# EAGLE board MBO (EAGLE 7.4.0)
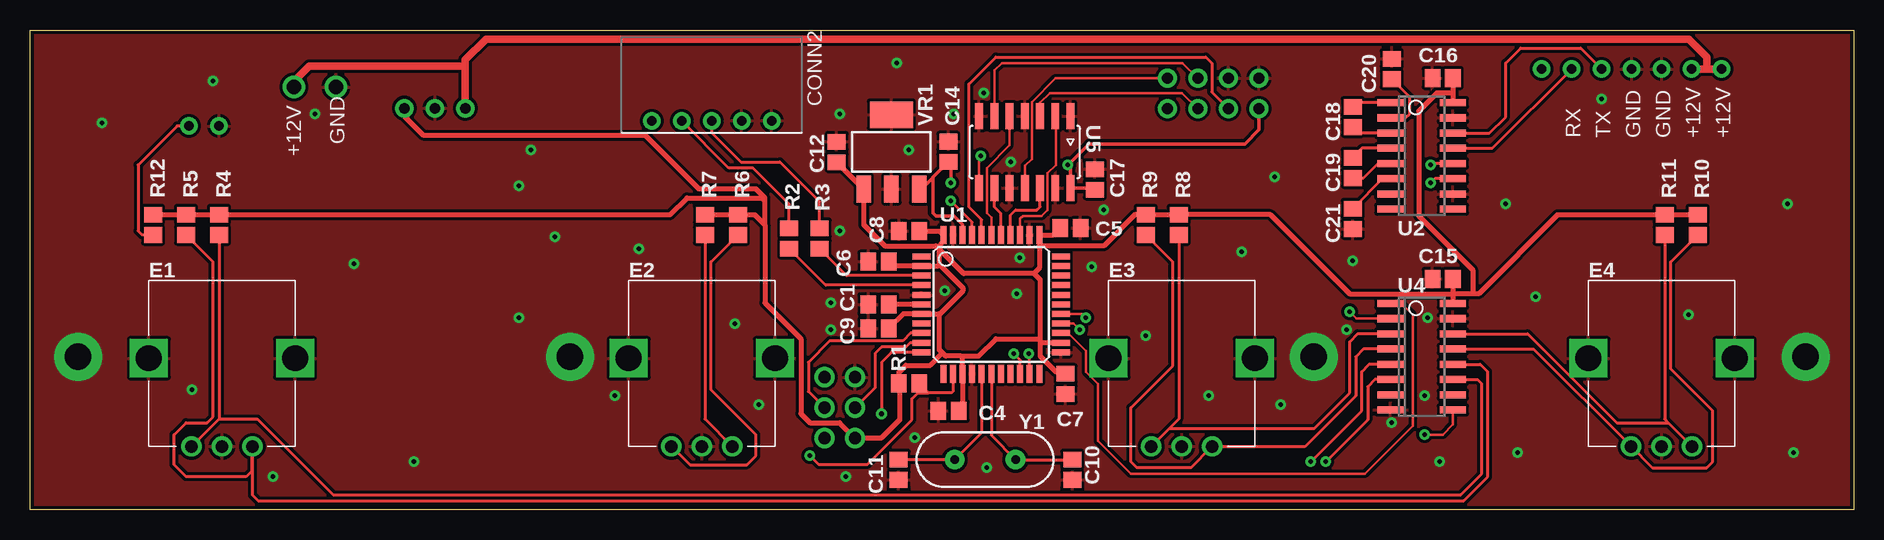
[diagram p0: board, top side]
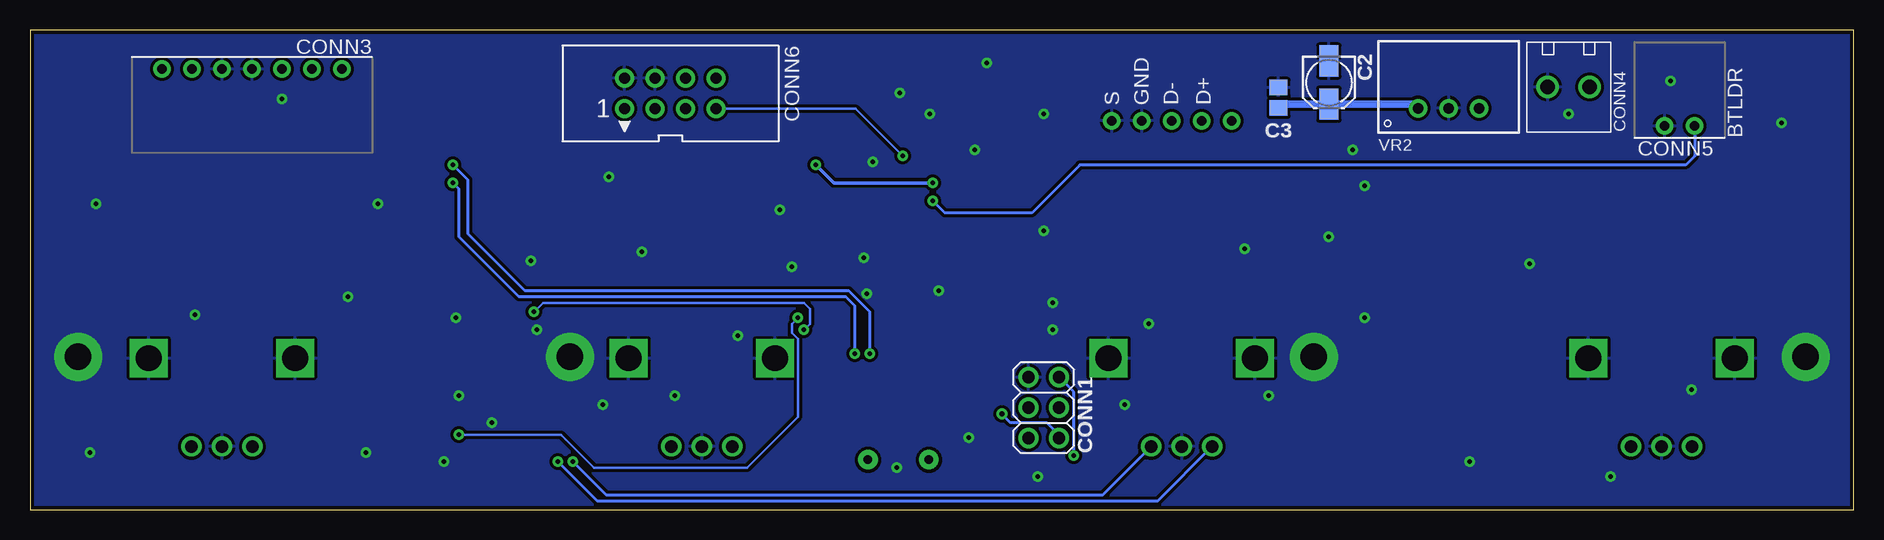
[diagram p1: board, bottom side, seen from below]

Size 152 x 40 mm. Coordinates in mm from the lower left corner, seen from the top.
Outline: 0,40 152,40 152,0 0,0 0,40
Copper layers (1*16): Top 0.035mm / dielectric 1.5mm / Bottom 0.035mm
Design rules "smiery *": minimum track width 8mil, minimum drill 12mil, track to track 7mil, track to pad 5mil, pad to pad 5mil, via to via 6mil, smd to smd 0mil, copper to edge 12mil, drill to drill 10mil, minimum pad ring 13mil, minimum via ring 10mil, stop-mask expansion 2mil, vias tented up to drill 25mil, thermal gap 10mil
Net classes: 0 default: width 0.203 mm; 1 vcc: width 0.254 mm

## Footprints (pad centres in the part's own frame; a part is rotated, then mirrored left to right if it is on the bottom)
C0805 = smd 1.3 x 1.5: 1 -0.85,0; 2 0.85,0
153CLV-0405 = smd 2.6 x 1.6: + 1.8,0; - -1.8,0
2X03-2.54-V = drill 1.016: 1 -2.54,-1.27; 2 -2.54,1.27; 3 0,-1.27; 4 0,1.27; 5 2.54,-1.27; 6 2.54,1.27
JST-XH-05P-H = drill 0.8: 1 -5,0; 2 -2.5,0; 3 0,0; 4 2.5,0; 5 5,0
JST-XH-07P-H = drill 0.8: 1 -7.5,0; 2 -5,0; 3 -2.5,0; 4 0,0; 5 2.5,0; 6 5,0; 7 7.5,0
MOLEX-39357-0002 = drill 1.2: P$1 -1.75,0; P$2 1.75,0
JST-XH-02P-H = drill 0.8: 1 -1.25,0; 2 1.25,0
IDC-08P-2.54 = drill 0.914: 1 -3.81,-1.27; 2 -3.81,1.27; 3 -1.27,-1.27; 4 -1.27,1.27; 5 1.27,-1.27; 6 1.27,1.27; 7 3.81,-1.27; 8 3.81,1.27
EC12E-1 = drill 1.016: A -2.54,-7.493; B 2.54,-7.493; C 0,-7.493 | drill 2.159 square: S1 -6.096,-0.127; S2 6.096,-0.127
R0805 = smd 1.3 x 1.5: 1 -0.85,0; 2 0.85,0
TQFP-44 = smd 1.5 x 0.5: 1 -5.8,4; 2 -5.8,3.2; 3 -5.8,2.4; 4 -5.8,1.6; 5 -5.8,0.8; 6 -5.8,0; 7 -5.8,-0.8; 8 -5.8,-1.6; 9 -5.8,-2.4; 10 -5.8,-3.2; 11 -5.8,-4; 23 5.8,-4; 24 5.8,-3.2; 25 5.8,-2.4; 26 5.8,-1.6; 27 5.8,-0.8; 28 5.8,0; 29 5.8,0.8; 30 5.8,1.6; 31 5.8,2.4; 32 5.8,3.2; 33 5.8,4 | smd 0.5 x 1.5: 12 -4,-5.8; 13 -3.2,-5.8; 14 -2.4,-5.8; 15 -1.6,-5.8; 16 -0.8,-5.8; 17 0,-5.8; 18 0.8,-5.8; 19 1.6,-5.8; 20 2.4,-5.8; 21 3.2,-5.8; 22 4,-5.8; 34 4,5.8; 35 3.2,5.8; 36 2.4,5.8; 37 1.6,5.8; 38 0.8,5.8; 39 0,5.8; 40 -0.8,5.8; 41 -1.6,5.8; 42 -2.4,5.8; 43 -3.2,5.8; 44 -4,5.8
SO16 = smd 2.2 x 0.6: 1 -2.6,4.445; 2 -2.6,3.175; 3 -2.6,1.905; 4 -2.6,0.635; 5 -2.6,-0.635; 6 -2.6,-1.905; 7 -2.6,-3.175; 8 -2.6,-4.445; 9 2.6,-4.445; 10 2.6,-3.175; 11 2.6,-1.905; 12 2.6,-0.635; 13 2.6,0.635; 14 2.6,1.905; 15 2.6,3.175; 16 2.6,4.445
SOIC14 = smd 2.2 x 0.66: 1 -3,3.81; 2 -3,2.54; 3 -3,1.27; 4 -3,0; 5 -3,-1.27; 6 -3,-2.54; 7 -3,-3.81; 8 3,-3.81; 9 3,-2.54; 10 3,-1.27; 11 3,0; 12 3,1.27; 13 3,2.54; 14 3,3.81
SOT223 = smd 2.235 x 1.219: 1 -3.099,2.311; 2 -3.099,0; 3 -3.099,-2.311 | smd 2.2 x 3.6: 4 3.099,0
TSR-1-2450 = drill 0.889: 1 -2.54,-1.778; 2 0,-1.778; 3 2.54,-1.778
HC49US = drill 0.7 pad 1.651: 1 -2.54,0; 2 2.54,0

## Placement (x,y rotation side)
C1  1u  [C0805]  70.73,17.12 180 top
C2  10n  [153CLV-0405]  43.73,35.61 270 bottom
C3  100n  [C0805]  47.92,34.34 90 bottom
C4  100n  [C0805]  76.57,8.23 180 top
C5  100n  [C0805]  86.73,23.47 0 top
C6  100n  [C0805]  70.73,20.67 180 top
C7  100n  [C0805]  86.32,10.48 270 top
C8  100n  [C0805]  73.27,23.21 180 top
C9  100n  [C0805]  70.73,15.08 180 top
C10  22p  [C0805]  86.88,3.33 90 top
C11  22p  [C0805]  72.4,3.33 90 top
C12  4.7u  [C0805]  67.23,29.82 90 top
C14  4.7u  [C0805]  76.55,29.84 90 top
C15  100n  [C0805]  117.75,19.25 0 top
C16  100n  [C0805]  117.75,36 0 top
C17  100n  [C0805]  88.76,27.53 90 top
C18  100n  [C0805]  110.25,32.75 270 top
C19  100n  [C0805]  110.25,28.5 270 top
C20  100n  [C0805]  113.5,36.75 90 top
C21  100n  [C0805]  110.25,24.25 270 top
CONN1  PINHD-2X03-TH-2.54MM-V  [2X03-2.54-V]  67.5,8.5 90 bottom
CONN2  PINHD-1X05-JST-XH-H  [JST-XH-05P-H]  56.82,32.42 0 top
CONN3  PINHD-1X07-JST-H  [JST-XH-07P-H]  133.5,36.75 180 bottom
CONN4  PINHD-1X02-MOLEX-39357-0002  [MOLEX-39357-0002]  23.75,35.25 180 bottom
CONN5  PINHD-1X02-JST-XH-H  [JST-XH-02P-H]  14.5,32 0 bottom
CONN6  PINHD-2X04-IDC-2.54-V  [IDC-08P-2.54]  98.62,34.71 0 bottom
E1  ALPS-EC12E24404AX  [EC12E-1]  16,12.75 0 top
E2  ALPS-EC12E24404AX  [EC12E-1]  56,12.75 0 top
E3  ALPS-EC12E24404AX  [EC12E-1]  96,12.75 0 top
E4  ALPS-EC12E24404AX  [EC12E-1]  136,12.75 0 top
R1  10k  [R0805]  73.27,10.51 180 top
R2  22  [R0805]  63.28,22.61 90 top
R3  22  [R0805]  65.82,22.61 90 top
R4  10k  [R0805]  15.75,23.75 90 top
R5  10k  [R0805]  13,23.75 90 top
R6  10k  [R0805]  59,23.75 90 top
R7  10k  [R0805]  56.25,23.75 90 top
R8  10k  [R0805]  95.75,23.75 90 top
R9  10k  [R0805]  93,23.75 90 top
R10  10k  [R0805]  139,23.75 90 top
R11  10k  [R0805]  136.25,23.75 90 top
R12  10k  [R0805]  10.25,23.75 90 top
U1  ATMEGA-32U4TQFP  [TQFP-44]  80.13,17.12 0 top
U2  MAX3232  [SO16]  116,29.5 0 top
U4  74HC165  [SO16]  116,12.75 0 top
U5  74AHC125  [SOIC14]  82.92,29.82 270 top
VR1  MCP1825  [SOT223]  71.8,29.83 90 top
VR2  TSR-1-2450  [TSR-1-2450]  33.75,35.25 0 bottom
Y1  16MHz  [HC49US]  79.62,4.16 180 top

## Library data of the parts
C1 C3-C12 C14-C21 CONN1-CONN3 CONN5 CONN6 E1-E4 R1-R12 = igor_lbr
C2 = igor_lbr; MANUFACTURER: Multicomp; MPN: MCVVT016M100CA1L
CONN4 = igor_lbr; MANUFACTURER: Molex; MPN: 39357-0002
U1 = igor_lbr; MPN: ATMEGA32U4-AUR
U2 = igor_lbr; MANUFACTURER: Texas Instruments; MPN: MAX3232CDR
U4 = igor_lbr; MANUFACTURER: Nexperia; MPN: 74HC165D
U5 = igor_lbr; MANUFACTURER: Texas Instruments; MPN: SN74AHC125DR
VR1 = igor_lbr; MANUFACTURER: Microchip; MPN: MCP1825S-3302E/DB
VR2 = igor_lbr; MANUFACTURER: Traco Power; MPN: TSR 1-2450
Y1 = igor_lbr; MANUFACTURER: TXC; MPN: 9B-8.000MEEJ-B

## Nets
+3V3: C14.1 C17.1 CONN6.1 U1.42 U5.14 VR1.3
+5V: C4.1 C5.1 C6.1 C7.1 C8.1 C9.1 C12.1 C15.2 C16.2 CONN1.2 R1.2 R4.2 R5.2 R6.2 R7.2 R8.2 R9.2 R10.2 R11.2 R12.2 U1.2 U1.7 U1.14 U1.24 U1.34 U1.44 U2.16 U4.16 VR1.1 VR2.3
+12V: C2.+ C3.1 CONN3.6 CONN3.7 CONN4.P$1 VR2.1
BTLDR_BUTTON: CONN5.2 R12.1 U1.41
C1+: C18.1 U2.1
C1-: C18.2 U2.3
C2+: C19.1 U2.4
C2-: C19.2 U2.5
D+: R2.1 U1.4
D+R: CONN2.2 R2.2
D-: R3.1 U1.3
D-R: CONN2.3 R3.2
DISPLAY_RX_5V: U1.20 U2.12
DISPLAY_RX_RS: CONN3.2 U2.13
DISPLAY_TX_5V: U1.21 U2.11
DISPLAY_TX_RS: CONN3.3 U2.14
E1A: E1.A R4.1 U4.11
E1B: E1.B R5.1 U4.12
E2A: E2.A R6.1 U4.6
E2B: E2.B R7.1 U4.5
E3A: E3.A R8.1 U4.3
E3B: E3.B R9.1 U4.4
E4A: E4.A R10.1 U4.13
E4B: E4.B R11.1 U4.14
GND: C1.2 C2.- C3.2 C4.2 C5.2 C6.2 C7.2 C8.2 C9.2 C10.1 C11.1 C12.2 C14.2 C15.1 C16.1 C17.2 C20.2 C21.2 CONN1.6 CONN2.4 CONN2.5 CONN3.4 CONN3.5 CONN4.P$2 CONN5.1 CONN6.2 CONN6.4 E1.C E1.S1 E1.S2 E2.C E2.S1 E2.S2 E3.C E3.S1 E3.S2 E4.C E4.S1 E4.S2 U1.5 U1.15 U1.23 U1.35 U1.43 U2.10 U2.15 U4.8 U4.15 U5.1 U5.4 U5.7 U5.10 U5.13 VR1.2 VR1.4 VR2.2
MISO: CONN1.1 U1.11
MOSI: CONN1.4 U1.10
MUX_COMMON_1: CONN6.3 U1.40
MUX_S0_3V3: CONN6.8 U5.11
MUX_S0_5V: U1.37 U5.12
MUX_S1_3V3: CONN6.7 U5.8
MUX_S1_5V: U1.38 U5.9
MUX_S2_3V3: CONN6.5 U5.3
MUX_S2_5V: U1.36 U5.2
MUX_S3_3V3: CONN6.6 U5.6
MUX_S3_5V: U1.39 U5.5
N$1: C1.1 U1.6
N$5: U1.30
RESET: CONN1.5 R1.1 U1.13
SCK: CONN1.3 U1.9
SR_DIN_CLOCK: U1.26 U4.2
SR_DIN_DATA: U1.27 U4.9
SR_DIN_LATCH: U1.25 U4.1
V+: C20.1 U2.2
V-: C21.1 U2.6
XTAL1: C10.2 U1.17 Y1.1
XTAL2: C11.2 U1.16 Y1.2

## Tracks (layer width: path | path; a pad name or v marks a point on that pad's centre or on a via)
+3V3  (via drill 0.4 pad 0.6)
  Top 0.305: C17.1 88.63,26.82 U5.14 86.73,28.52 v86.5,28.75 88.25,30.5 101.25,30.5 102.43,31.68 CONN6.1 | VR1.3 74.29,26.73 75.25,27.68 | C14.1 75.28,27.72 75.25,27.68 | 76.79,28.75 C14.1 | v76.75,27.25 76.75,28.79 C14.1 | U1.42 77.73,23.77 77,24.5 75.5,24.5 75.25,24.75 75.25,27.68
  Bottom 0.305: v76.75,27.25 85,27.25 v86.5,28.75
+5V
  Top 0.406: C4.1 77.73,8.53 U1.14 77.73,12.66 77.59,12.8 | C5.1 85.33,22.92 U1.34 84.13,22 | C6.1 71.93,20.32 U1.2 75.71,20.32 75.81,20.42 | C9.1 72.81,16.32 U1.7 75.77,16.32 75.81,16.35 75.81,13.31 76.06,13.05 | 83.68,19.68 84.19,19.18 84.19,14.25 | 84.19,14.25 84.19,13.81 | 77.59,12.8 76.32,12.8 76.06,13.05 | U1.24 84.29,13.92 84.19,13.81 | 76.06,13.05 75.05,12.04 73.01,12.04 72.42,11.44 R1.2 72.51,10.42 72.51,7.51 70.96,5.96 CONN1.2 67.48,7.25 65,7.25 64.25,8 64.25,14.25 61.25,17.25 61.25,23.75 | C12.1 67.25,28.97 VR1.1 69.49,23.76 71.25,22 75.5,22 75.62,21.88 | C8.1 75.83,23.21 U1.44 76.13,22.38 75.62,21.88 | 84.13,22 84.13,20.13 83.68,19.68 | 75.81,20.42 75.81,21.69 | 75.81,21.69 75.62,21.88 | 83.68,19.68 77.82,19.68 75.81,21.69 | 75.81,20.42 75.83,20.42 77.75,18.5 77.75,18.25 75.75,16.25 | 85.92,11.33 C7.1 86.14,11.5 85.5,11.5 84.19,12.81 84.19,13.81 | C15.2 118.6,18 | 118.6,18 U4.16 | R7.2 R6.2 60.4,24.6 61.25,23.75 | R10.2 R11.2 127.35,24.6 120.75,18 120.25,18 | C16.2 118.6,34.75 | 118.6,34.75 U2.16 | 84.13,22 89.5,22 92.1,24.6 R9.2 R8.2 103.4,24.6 110,18 118.6,18 | 61.25,23.75 61.25,25.75 | 61.25,25.75 61.25,26 60.5,26.75 55.75,26.75 51.25,31.25 32.75,31.25 31.21,32.79 VR2.3 | 120.25,18 118.6,18 | 118.6,34.75 117.25,34.75 115.75,33.25 115.75,24.5 120.25,20 120.25,18 | 77.59,12.8 79.05,12.8 80.5,14.25 84.19,14.25 | 61.25,25.75 61,26 54.75,26 53.35,24.6 R4.2 R5.2 R12.2
+12V
  Top 0.61: CONN3.6 139.75,36.75 | 139.75,36.75 CONN3.7 | VR2.1 36.29,37 | 36.29,37 36.29,37.54 38,39.25 138.25,39.25 139.75,37.75 139.75,36.75 | CONN4.P$1 22,35.75 23.25,37 36.29,37
  Bottom 0.61: C3.1 47.61,33.81 C2.+ 36.63,33.81 VR2.1
BTLDR_BUTTON  (via drill 0.4)
  Top 0.254: CONN5.2 12.25,32 9,28.75 9,23.25 9.35,22.9 R12.1 | U1.41 78.53,23.97 v76.75,25.75
  Bottom 0.254: CONN5.2 13.25,29.5 14,28.75 64.5,28.75 68.5,24.75 75.75,24.75 v76.75,25.75
C1+
  Top 0.254: U2.1 110.59,33.95 C18.1
C1-
  Top 0.254: U2.3 110.75,31.41 C18.2
C2+
  Top 0.254: U2.4 111.03,30.14 C19.1
C2-
  Top 0.254: C19.2 111.15,27.65 112.36,28.86 U2.5
D+
  Top 0.254: U1.4 66.33,18.72 R2.1
D+R
  Top 0.254: R2.2 63.28,25.47 60.25,28.5 58.25,28.5 CONN2.2
D-
  Top 0.254: U1.3 68.07,19.52 R3.1
D-R
  Top 0.254: 65.79,23.46 R3.2 65.82,25.68 62.5,29 59.25,29 56.82,31.43 CONN2.3
DISPLAY_RX_5V  (via drill 0.4)
  Top 0.254: U1.20 82.53,12.47 v82,13 | U2.12 116.86,28.86 v116.75,28.75
  Bottom 0.254: v82,13 82,16.5 83.75,18.25 110.75,18.25 115.5,23 115.5,27.5 v116.75,28.75
DISPLAY_RX_RS
  Top 0.254: U2.13 121.89,30.14 CONN3.2
DISPLAY_TX_5V  (via drill 0.4)
  Top 0.254: U1.21 83.33,12.92 v83.25,13 | U2.11 117.09,27.59 v116.75,27.25
  Bottom 0.254: v83.25,13 83.25,17 84,17.75 111.25,17.75 116.25,22.75 116.25,26.75 v116.75,27.25
DISPLAY_TX_RS
  Top 0.254: U2.14 121.66,31.41 123,32.75 123,37.25 124.25,38.5 129.25,38.5 CONN3.3
E1A
  Top 0.254: R4.1 15.75,7.55 | 15.75,7.55 E1.A | 15.75,7.55 18.95,7.55 25.25,1.25 119.25,1.25 121,3 121,10.5 120.66,10.85 U4.11
E1B
  Top 0.254: R5.1 15.25,20.65 15.25,7.75 14.75,7.25 13,7.25 12,6.25 12,3.75 13,2.75 18,2.75 18.5,3.25 18.5,5.22 E1.B 18.54,1.21 19,0.75 119.5,0.75 121.5,2.75 121.5,11.5 120.89,12.12 U4.12
E2A  (via drill 0.4)
  Top 0.254: R6.1 56.75,20.65 56.75,10 60.5,6.25 60.5,4.5 59.75,3.75 55,3.75 53.49,5.26 E2.A | v108,4 111.5,7.5 111.5,10.25 112.09,10.85 U4.6
  Bottom 0.254: v108,4 104.75,0.75 57.97,0.75 E2.A
E2B  (via drill 0.4)
  Top 0.254: v106.75,4 111,8.25 111,11.5 111.61,12.12 U4.5 | R7.1 56.25,7.55 E2.B
  Bottom 0.254: v106.75,4 104,1.25 62.55,1.25 E2.B
E3A
  Top 0.254: U4.3 110.66,14.65 110,14 110,9.75 107,6.75 94.95,6.75 | 94.95,6.75 E3.A | R8.1 95.75,7.55 94.95,6.75
E3B
  Top 0.254: R9.1 95.25,20.65 95.25,12 91.75,8.5 91.75,4 92.25,3.5 96.78,3.5 E3.B 106.25,5.25 110.5,9.5 110.5,12.75 111.14,13.38 U4.4
E4A
  Top 0.254: R10.1 136.75,20.65 136.75,11.75 140.25,8.25 140.25,4 139.75,3.5 135.22,3.5 E4.A 125.33,13.38 U4.13
E4B
  Top 0.254: U4.14 124.84,14.65 132.25,7.25 136.55,7.25 | 136.55,7.25 E4.B | R11.1 136.25,7.55 136.55,7.25
GND  (via drill 0.4 pad 0.6, 2.2 pad 4)
  other vias: 73.25,30 82.5,21 82.25,18 77,33 79.5,34.75 89.5,25 67.5,23.25 66.75,17.25 66.75,15 76.25,18.25 79.75,3.5 73.75,6 68,2.75 67.5,33 116.5,16 109.75,15 81.75,29 40.75,16 50.75,21.75 43.75,22.75 32,4 27,20.5 23.75,33 40.75,27 131,34.25 124,4.75 117.5,4 138.25,16.25 123,25.5 72.25,37.25 13.5,10 6,32.25 15.25,35.75 48.75,9.5 4,12.75 148,12.75 45,12.75 107,12.75 104.25,8.75 116.25,9.5 113.5,7.25 58.75,15.5 60.75,8.75 103.75,27.75 101,21.5 110.25,20.75 125.5,17.75 147,4.75 146.5,25.5 93,14.5 88.5,20.25 98.25,9.5 20.25,2.75 41.75,30
  pour Bottom (isolate 0.254): 0,40 152,40 152,0 0,0
  pour Top (isolate 0.254): 0,40 152,40 152,0 0,0
MISO  (via drill 0.4 pad 0.6)
  Top 0.254: U1.11 71.81,13.12 70.98,12.29 v70.98,7.97
  Bottom 0.254: CONN1.1 66.23,6.23 67.25,7.25 70.26,7.25 v70.98,7.97
MOSI
  Top 0.254: U1.10 73.37,13.92 73.01,13.56 70.98,13.56 70.47,13.05 70.47,10.2 CONN1.4
MUX_COMMON_1
  Top 0.254: U1.40 79.33,24.17 78.25,25.25 78.25,35.5 80.5,37.75 98,37.75 98.5,37.25 98.5,34.83 CONN6.3
MUX_S0_3V3
  Top 0.203: CONN6.8 85.48,35.98 83.5,34 83.5,29.25 82.92,28.67 U5.11
MUX_S0_5V
  Top 0.254: U1.37 81.73,24.56 82.16,24.99 83.94,24.99 84.19,25.24 U5.12
MUX_S1_3V3  (via drill 0.4 pad 0.6)
  Top 0.203: U5.8 79.11,29.36 v79.25,29.5
  Bottom 0.203: CONN6.7 83.19,33.44 v79.25,29.5
MUX_S1_5V
  Top 0.254: U1.38 80.93,24.7 80.38,25.24 U5.9
MUX_S2_3V3
  Top 0.203: U5.3 84.19,33.94 85,34.75 96.04,34.75 CONN6.5
MUX_S2_5V
  Top 0.203: U1.36 82.53,24.28 82.75,24.5 84.3,24.5 84.8,25 84.8,28.05 85.5,28.75 85.5,32.78 U5.2
MUX_S3_3V3
  Top 0.203: U5.6 80.38,36.63 81,37.25 96.08,37.25 CONN6.6
MUX_S3_5V
  Top 0.203: U1.39 80.13,24.37 79.75,24.75 79.75,28.5 81.65,30.4 U5.5
N$1
  Top 0.406: U1.6 C1.1
RESET  (via drill 0.4)
  Top 0.254: U1.13 76.93,9.85 76.82,9.75 74.88,9.75 | 74.88,9.75 R1.1 | 74.88,9.75 74,9.75 73.5,9.25 73.5,7.5 69.75,3.75 65.75,3.75 v65,4.5
  Bottom 0.254: v65,4.5 65,9.81 CONN1.5
SCK
  Top 0.254: U1.9 73.41,14.72 72.76,14.07 66.66,14.07 64.89,12.29 64.89,9.84 CONN1.3
SR_DIN_CLOCK  (via drill 0.4)
  Top 0.203: U1.26 86.98,15.52 v87.5,15 | U4.2 110.58,15.93 v110,16.5
  Bottom 0.203: 87.75,14.75 v87.5,15 87,15.5 87,16.75 87.5,17.25 109.25,17.25 v110,16.5
SR_DIN_DATA  (via drill 0.4)
  Top 0.203: U1.27 87.68,16.32 v88,16 | U4.9 118.6,7.1 117.75,6.25 v116.25,6.25
  Bottom 0.203: v88,16 88.5,15.5 88.5,14.75 88,14.25 88,7.75 92.25,3.5 105,3.5 107.75,6.25 v116.25,6.25
SR_DIN_LATCH
  Top 0.203: U1.25 86.53,14.72 88,13.25 88,11.5 89,10.5 89,5.75 91.75,3 111.25,3 115.25,7 115.25,16.25 114.31,17.2 U4.1
V+
  Top 0.254: U2.2 114.67,32.67 115,33 115,34.4 C20.1
V-
  Top 0.254: U2.6 112.75,27.59 C21.1
XTAL1
  Top 0.254: U1.17 80.13,6.19 Y1.1 86.86,4.16 C10.2
XTAL2
  Top 0.254: U1.16 79.33,6.41 Y1.2 72.41,4.16 C11.2

## Text on the board
tNames: RX | TX | GND | GND | +12V | +12V | GND | +12V
bNames: D+ | D- | GND | S | BTLDR